# Altium PCB PCB1.PcbDoc
Units mm, origin at the board's own origin, x right, y up, seen from the top; angles counter-clockwise.
Board outline 161 x 122 mm, 2 copper layers (Top Layer, Bottom Layer); 10 components, 50 nets, 180 pads, 44 vias.
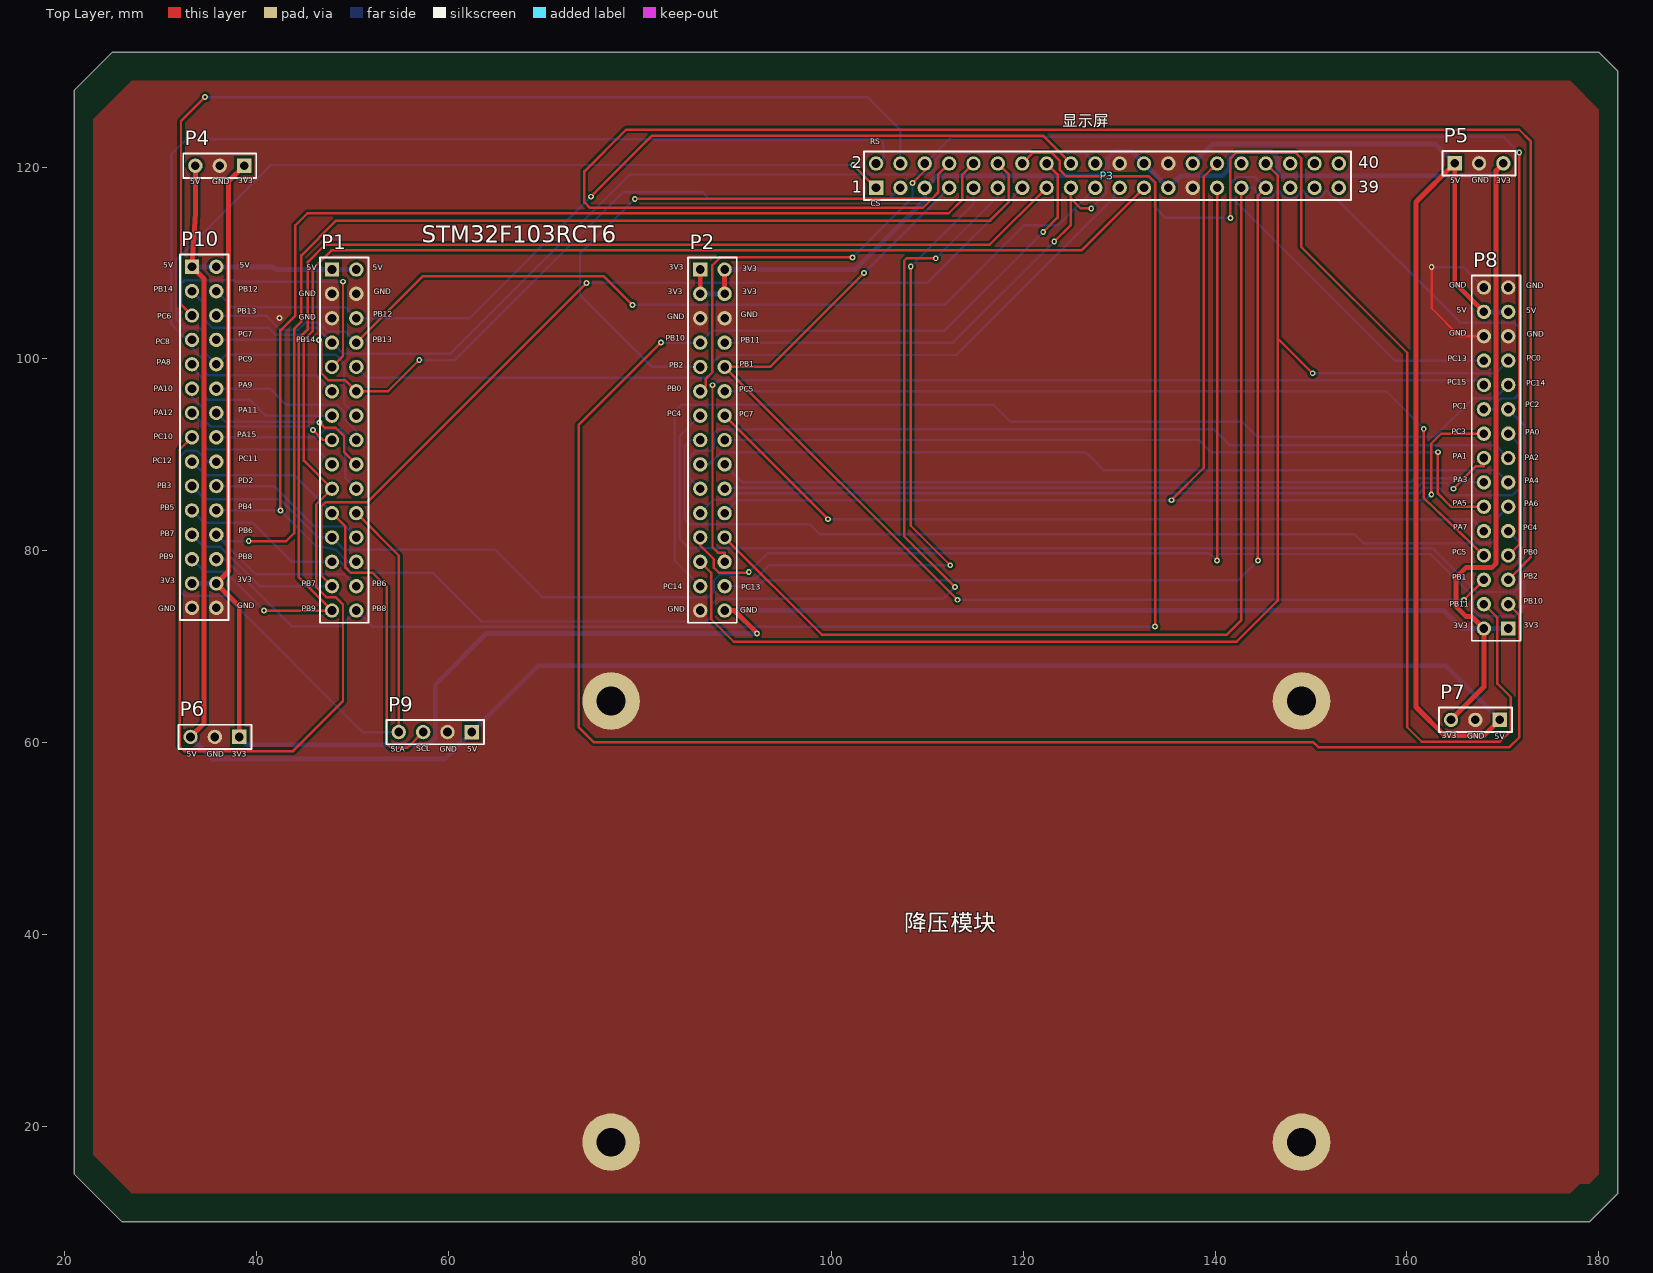
[diagram p0: Top Layer view]
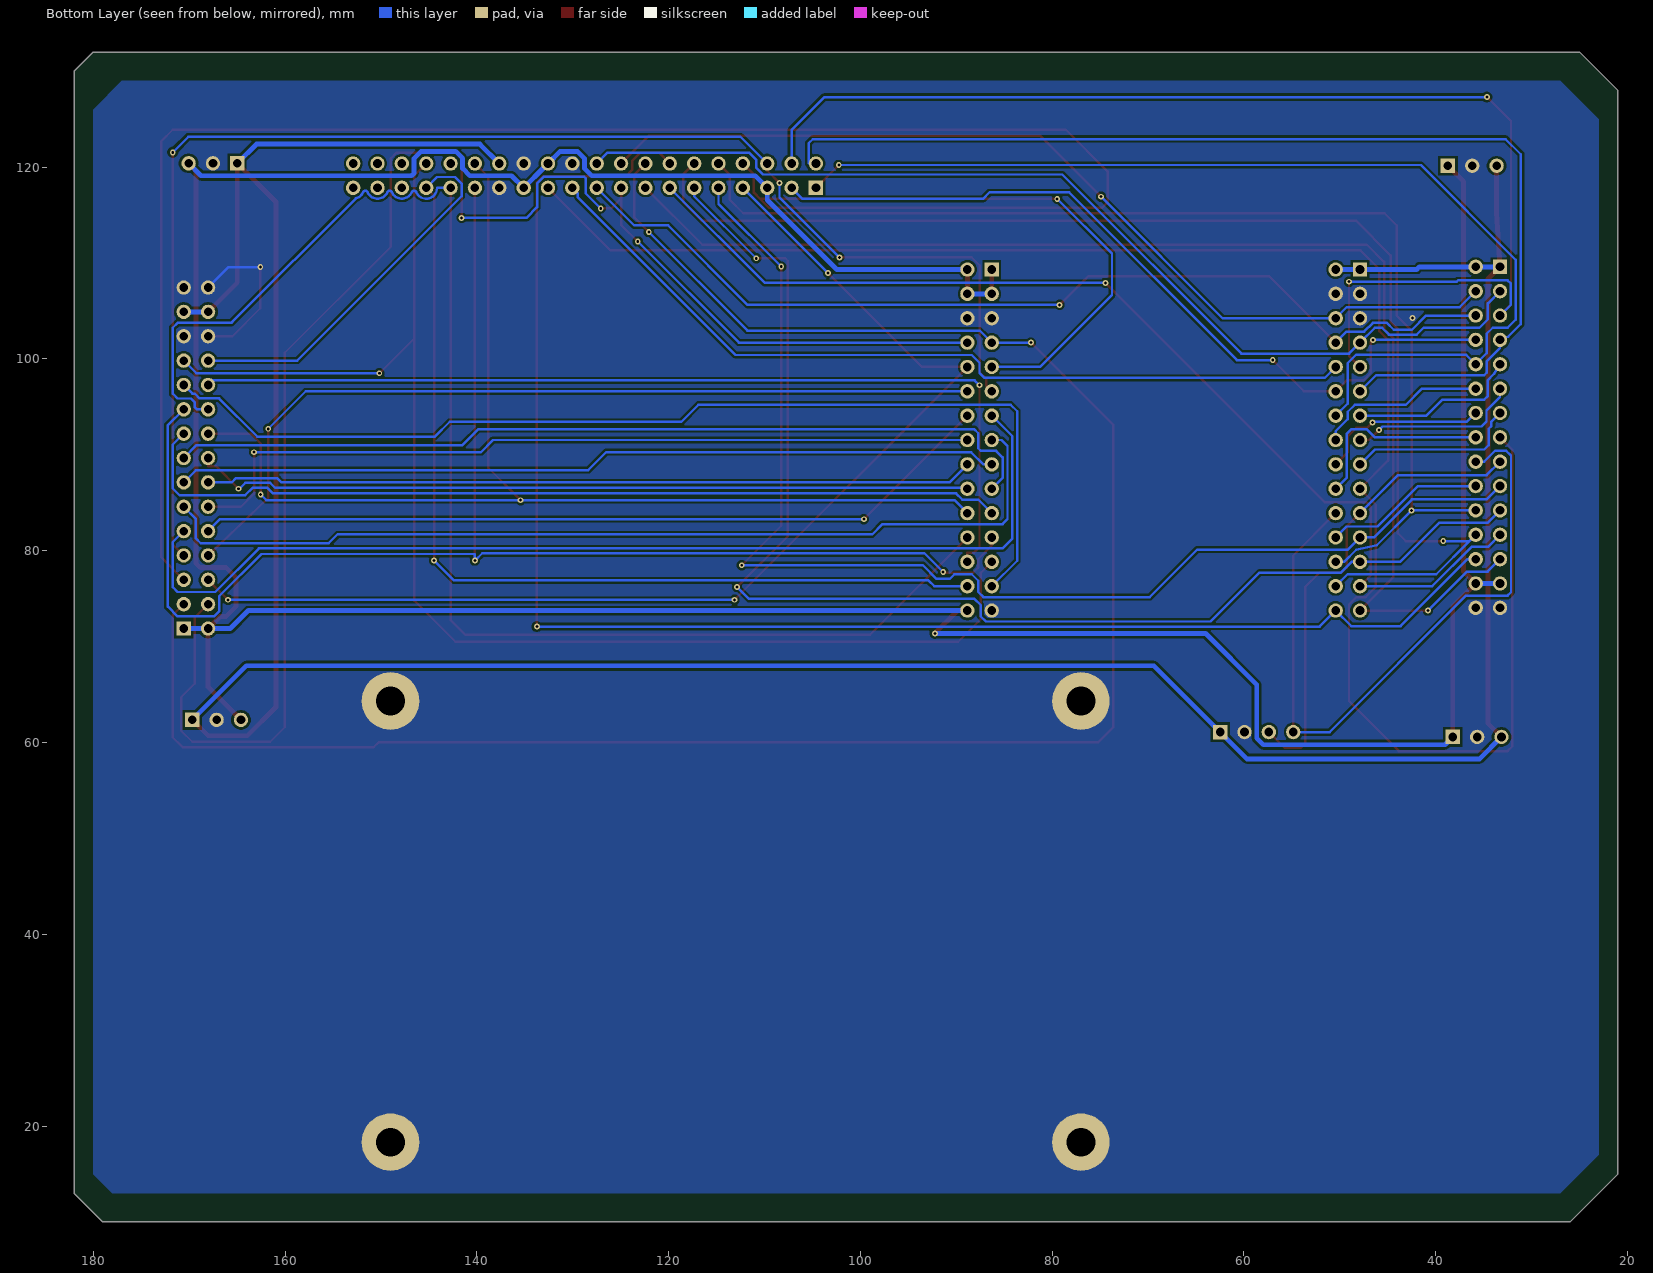
[diagram p1: Bottom Layer view, seen from below]

## Layer stack, top to bottom
Top Solder: solder mask 0.0102, Solder Resist, Dk 3.5
Top Layer: signal copper 0.0356
Dielectric 1: dielectric 0.32, FR-4, Dk 4.8
Bottom Layer: signal copper 0.0356
Bottom Solder: solder mask 0.0102, Solder Resist, Dk 3.5

## Board outline
21,15 21,128 25,132 180,132 182,130 182,13 179,10 26,10

## Design rules (kind name [scope] priority, off if disabled: settings)
Clearance [All] p1: gap=0.254 ignorepadtopadclearanceinfootprint=FALSE
PlaneConnect [All] p1: planeconnectstyle=Direct reliefexpansion=0.508 reliefentries=4 reliefconductorwidth=0.254 reliefairgap=0.254
PolygonConnect [All] p1: connectstyle=Direct reliefconductorwidth=0.254 reliefentries=4 polygonreliefangle="90 Angle" airgapwidth=0.254
RoutingVias [All] p1: holewidth=0.305 width=0.61 viastyle="Through Hole" minholewidth=0.305 minwidth=0.61 maxholewidth=0.305 maxwidth=0.61
SolderMaskExpansion [All] p1: expansion=0.102 istentingtop=FALSE
Width Width_2 [InNet('5v')] p1: maxlimit=0.508 minlimit=0.508 preferedwidth=0.508 minimp=50.000000 maximp=50.000000 favimp=50.000000
Width Width_1 [InNet('3V3')] p2: maxlimit=0.508 minlimit=0.508 preferedwidth=0.508 minimp=50.000000 maximp=50.000000 favimp=50.000000
Width [All] p3: maxlimit=0.254 minlimit=0.254 preferedwidth=0.254
29 further rules are at their usual default settings.

## Components (designator, comment, footprint, x,y, rotation, side; value= is the part's Value field where it differs from the comment)
P1 "LEFT" IDE15X2_2.54 47.899,109.32 r270 top locked
P2 "RIGHT" IDE15X2_2.54 86.3,109.32 r270 top locked
P3 "显示屏" HDR2X20 104.635,117.835 r0 top
P4 "Header 3" HDR1X3 38.735,120.142 r180 top
P5 "Header 3" HDR1X3 164.973,120.396 r0 top
P6 "Header 3" HDR1X3 38.227,60.579 r180 top
P7 "Header 3" HDR1X3 169.672,62.357 r180 top
P8 "" IDE15X2_2.54 170.561,71.882 r90 top
P9 "Header 4" HDR1X4 62.484,61.087 r180 top
P10 "" IDE15X2_2.54 33.3,109.6 r270 top

## Footprints (in the part's own frame and the unit in brackets; to place one, negate y for a bottom-side part, rotate by r counter-clockwise, add the part's x,y. Pads: shape width x height; smd on the part's side, far side on the other; paste and mask are expansions set on the pad)
HDR1X3 [mm] "Connector; Header; 3 Position"
  rect 1.5x1.5 hole 0.9: 1(0,0)
  round 1.5 hole 0.9: 2(2.54,0) 3(5.08,0)
  silkscreen extent -1.27,-1.27 6.35,1.27
HDR1X4 [mm] "Connector; Header; 4 Position"
  rect 1.5x1.5 hole 0.9: 1(0,0)
  round 1.5 hole 0.9: 2(2.54,0) 3(5.08,0) 4(7.62,0)
  silkscreen extent -1.27,-1.27 8.89,1.27
HDR2X20 [mm] "Connector; Header; 20x2 Position"
  rect 1.5x1.5 hole 0.9: 1(0,0)
  round 1.5 hole 0.9: 2(0,2.54) 3(2.54,0) 4(2.54,2.54) 5(5.08,0) 6(5.08,2.54) 7(7.62,0) 8(7.62,2.54) 9(10.16,0) 10(10.16,2.54) 11(12.7,0) 12(12.7,2.54) 13(15.24,0) 14(15.24,2.54) 15(17.78,0) 16(17.78,2.54) 17(20.32,0) 18(20.32,2.54) 19(22.86,0) 20(22.86,2.54) 21(25.4,0) 22(25.4,2.54) 23(27.94,0) 24(27.94,2.54) 25(30.48,0) 26(30.48,2.54) 27(33.02,0) 28(33.02,2.54) 29(35.56,0) 30(35.56,2.54) 31(38.1,0) 32(38.1,2.54) 33(40.64,0) 34(40.64,2.54) 35(43.18,0) 36(43.18,2.54) 37(45.72,0) 38(45.72,2.54) 39(48.26,0) 40(48.26,2.54)
  silkscreen extent -1.27,-1.27 49.53,3.81
IDE15X2_2.54 [mm]
  rect 1.5x1.5 hole 0.9: 1(0,0)
  round 1.5 hole 0.9: 2(0,2.54) 3(2.54,0) 4(2.54,2.54) 5(5.08,0) 6(5.08,2.54) 7(7.62,0) 8(7.62,2.54) 9(10.16,0) 10(10.16,2.54) 11(12.7,0) 12(12.7,2.54) 13(15.24,0) 14(15.24,2.54) 15(17.78,0) 16(17.78,2.54) 17(20.32,0) 18(20.32,2.54) 19(22.86,0) 20(22.86,2.54) 21(25.4,0) 22(25.4,2.54) 23(27.94,0) 24(27.94,2.54) 25(30.48,0) 26(30.48,2.54) 27(33.02,0) 28(33.02,2.54) 29(35.56,0) 30(35.56,2.54)
  silkscreen extent -1.27,-1.27 36.83,3.81

## Part data
P1 P2 P8 P10: library part "Header 15X2", "Header, 15-Pin, Dual row", LatestRevisionDate=17-Jul-2002, LatestRevisionNote="Re-released for DXP Platform.", Publisher="Altium Limited"
P3: library part "Header 20X2", "Header, 20-Pin, Dual row", LatestRevisionDate=17-Jul-2002, LatestRevisionNote="Re-released for DXP Platform.", Publisher="Altium Limited"
P4 P5 P6 P7: "Header, 3-Pin", LatestRevisionDate=17-Jul-2002, LatestRevisionNote="Re-released for DXP Platform.", Publisher="Altium Limited"
P9: "Header, 4-Pin", LatestRevisionDate=17-Jul-2002, LatestRevisionNote="Re-released for DXP Platform.", Publisher="Altium Limited"

## Free pads (board coordinates)
  round 6 hole 3: 1(77,18.325) 1(77,64.325) 1(149,18.325) 1(149,64.325)

## Via types
v1: diameter 0.61, hole 0.305, Top Layer to Bottom Layer, 44 vias

## Nets (pads, with @x,y where several pads share a name; then routed paths per layer and width w, separated by ;. In a path a pad name is that pad's centre, name@x,y a point inside that pad or via, vN(x,y) a via of type N, cw(c..) or ccw(c..) an arc to the next point about the centre after c; other vN are vias at no path point)
3V3: P2.1 P2.2 P2.3 P2.4 P2.30 P3.5 P3.24 P3.25 P4.1 P5.3 P6.1 P7.3 P8.1 P8.2 P10.27 P10.28 | length 380.3
  Top Layer w0.508: P6.1 38.227,74.193 P10.28 37.109,77.849 37.109,118.516 P4.1 ; P2.3 P2.1 ; P2.30 89.841,73.76 v1(92.227,71.374) ; P2.4 P2.2 ; P7.3 168.021,65.786 P8.2 166.776,73.127 166.167,73.127 165.125,74.168 165.125,77.216 166.141,78.232 168.827,78.232 169.291,78.696 169.291,119.634 P5.3
  Bottom Layer w0.508: P10.27 P10.28 ; P6.1 39.04,59.766 57.988,59.766 58.674,60.452 58.674,66.04 64.008,71.374 v1(92.227,71.374) ; P2.3 P2.4 ; P2.30 90.651,73.76 90.653,73.762 163.828,73.762 165.708,71.882 P8.2 P8.1 ; P2.2 102.463,109.32 109.715,116.572 P3.5 110.981,119.101 128.016,119.101 128.777,119.862 128.777,120.904 129.506,121.633 131.317,121.633 P3.24 ; P5.3 168.758,119.101 146.812,119.101 146.533,119.38 146.533,120.904 145.804,121.633 142.206,121.633 141.477,120.904 141.477,119.862 140.716,119.101 136.381,119.101 P3.25 P3.24@132.943,120.007 ; P3.24 P3.24@132.943,120.007 ; P3.24 132.575,120.363 132.93,120.007 P3.24@132.943,120.007
5V: P1.1 P1.2 P3.28 P4.3 P5.1 P6.3 P7.1 P8.27 P8.28 P9.1 P10.1 P10.2 | length 339.1
  Top Layer w0.508: P6.3 34.569,62.001 34.569,108.331 P10.1 33.655,115.239 P4.3 ; P8.28 164.973,107.95 P5.1 160.934,116.357 160.934,63.703 163.932,60.706 168.021,60.706 P7.1
  Bottom Layer w0.508: P6.3 35.433,58.293 59.69,58.293 P9.1 69.393,67.996 164.033,67.996 P7.1 ; P10.1 P10.2 41.707,109.6 41.987,109.32 P1.1 P1.2 ; P3.28 139.675,122.395 162.974,122.395 P5.1 ; P8.28 P8.27
GND: P1.3 P1.4 P1.5 P2.5 P2.6 P2.29 P3.22 P3.26 P3.27 P4.2 P5.2 P6.2 P7.2 P8.25 P8.26 P8.29 P8.30 P9.2 P10.29 P10.30 pad.1 | length 17.3
  Top Layer w0.254: v1(162.575,109.575) 162.575,105.275 165.488,102.362 P8.26
  Bottom Layer w0.254: v1(162.575,109.575) 165.888,109.575 P8.30
  other v1: 42.418,104.267
PA0: P2.21 P8.17 | length 93.3
  Bottom Layer w0.254: P2.21 87.699,85.319 89.357,85.319 90.018,85.979 161.266,85.979 161.843,86.556 163.376,86.556 164.156,85.776 170.993,85.776 171.704,86.487 171.704,91.059 P8.17
PA1: P2.20 P8.16 | length 81.5
  Top Layer w0.254: v1(164.846,86.462) 167.208,88.824 168.021,88.824 P8.16
  Bottom Layer w0.254: P2.20 88.943,86.563 161.036,86.563 161.537,87.064 164.142,87.064 164.744,86.462 v1(164.846,86.462)
PA2: P2.19 P8.15 | length 92.5
  Bottom Layer w0.254: P2.19 85.166,87.594 85.166,89.723 85.852,90.409 87.427,90.409 87.706,90.688 87.706,92.253 88.138,92.685 139.827,92.685 141.503,91.008 169.215,91.008 P8.15
PA3: P2.18 P8.14 | length 80.3
  Bottom Layer w0.254: P2.18 90.718,87.122 160.377,87.122 160.827,87.572 165.105,87.572 165.555,87.122 P8.14
PA4: P2.17 P8.13 | length 86.1
  Bottom Layer w0.254: P2.17 87.177,89 88.449,90.272 126.517,90.272 128.397,88.392 169.291,88.392 P8.13
PA5: P2.16 P8.12 | length 84.6
  Top Layer w0.254: v1(163.22,90.272) 163.22,85.954 164.592,84.582 P8.12
  Bottom Layer w0.254: P2.16 138.305,91.54 139.573,90.272 v1(163.22,90.272)
PA6: P2.15 P8.11 | length 99.3
  Bottom Layer w0.254: P2.15 85.266,91.54 84.658,90.932 84.658,83.287 85.166,82.779 97.688,82.779 98.755,81.712 154.508,81.712 155.448,80.772 168.783,80.772 169.291,81.28 169.291,83.312 P8.11
PA7: P2.14 P8.10 | length 84.2
  Top Layer w0.254: P2.14 v1(99.633,83.287)
  Bottom Layer w0.254: v1(99.633,83.287) 166.776,83.287 P8.10
PA8: P1.13 P10.9 | length 17.9
  Bottom Layer w0.254: P10.9 33.948,98.423 34.569,97.801 34.569,96.128 34.939,95.758 39.294,95.758 40.972,94.08 P1.13
PA9: P1.16 P10.12 | length 17.8
  Bottom Layer w0.254: P10.12 41.427,96.9 43.103,95.225 48.438,95.225 49.174,94.488 49.174,93.726 50.439,92.461 P1.16
PA10: P1.15 P10.11 | length 18
  Top Layer w0.254: v1(45.923,92.583) 46.966,91.54 P1.15
  Bottom Layer w0.254: P10.11 33.3,96.012 34.709,94.603 34.709,93.472 35.23,92.951 45.555,92.951 v1(45.923,92.583)
PA11: P1.18 P10.14 | length 17.8
  Top Layer w0.254: v1(46.609,93.37) 47.168,92.812 48.285,92.812 49.149,91.948 49.149,90.29 P1.18
  Bottom Layer w0.254: P10.14 36.741,93.459 46.52,93.459 v1(46.609,93.37)
PA12: P1.17 P10.13 | length 18.1
  Bottom Layer w0.254: P10.13 34.201,93.459 34.201,92.996 34.476,92.721 34.476,91.014 34.939,90.551 46.348,90.551 P1.17
PA15: P1.20 P10.16 | length 20.2
  Bottom Layer w0.254: P10.16 46.354,91.82 47.219,92.685 48.768,92.685 49.301,92.151 49.301,87.598 P1.20
PB0: P2.11 P3.6 P8.7 | length 147.9
  Top Layer w0.254: P2.11 86.893,97.213 86.893,97.942 87.554,98.603 87.554,109.753 88.392,110.592 v1(102.184,110.592) ; v1(108.433,118.339) 109.715,119.621 P3.6 ; P8.7 171.704,80.645 v1(171.704,121.539)
  Bottom Layer w0.254: v1(102.184,110.592) 108.433,116.84 v1(108.433,118.339) ; P3.6 112.505,123.165 170.078,123.165 v1(171.704,121.539)
PB1: P2.10 P3.7 P8.6 | length 121.3
  Top Layer w0.254: v1(103.386,108.966) 93.58,99.16 P2.10 v1(113.121,74.879) ; v1(165.938,74.879) P8.6
  Bottom Layer w0.254: v1(103.386,108.966) P3.7 ; v1(113.121,74.879) v1(165.938,74.879)
PB2: P2.9 P3.8 P8.5 | length 251.2
  Top Layer w0.254: v1(79.477,116.688) 110.439,116.688 ; P3.8 111.1,119.22 111.1,117.348 110.439,116.688 ; P8.5 172.898,79.299 172.898,122.707 171.704,123.901 78.562,123.901 74.219,119.558 74.219,116.332 74.803,115.748 109.499,115.748 110.439,116.688
  Bottom Layer w0.254: v1(79.477,116.688) 73.762,110.973 73.762,106.655 81.256,99.16 P2.9
PB3: P1.23 P3.9 P10.19 | length 130.1
  Top Layer w0.254: v1(108.255,109.626) 108.255,82.601 v1(112.37,78.486)
  Bottom Layer w0.254: P10.19 34.696,85.344 42.494,85.344 46.458,81.38 P1.23 49.167,80.112 64.872,80.112 69.825,75.159 87.173,75.159 87.706,75.692 87.706,76.86 88.392,77.546 90.201,77.546 90.679,77.068 92.051,77.068 93.469,78.486 v1(112.37,78.486) ; v1(108.255,109.626) 114.795,116.167 P3.9
PB4: P1.26 P3.10 P10.22 | length 122
  Top Layer w0.254: v1(42.52,84.2) 42.52,102.976 44.082,104.539 44.082,113.932 45.339,115.189 112.217,115.189 113.64,116.611 113.64,119.22 P3.10
  Bottom Layer w0.254: P10.22 v1(42.52,84.2) 46.151,80.569 48.297,80.105 49.562,78.84 P1.26
PB5: P1.25 P3.11 P10.21 | length 136.2
  Top Layer w0.254: v1(110.858,110.49) 107.823,110.49 107.569,110.236 107.569,81.483 v1(112.852,76.2)
  Bottom Layer w0.254: P10.21 34.569,82.931 39.624,82.931 43.715,78.84 P1.25 48.77,78.84 49.901,77.709 58.384,77.709 63.475,72.619 86.919,72.619 87.452,73.152 87.452,74.32 88.113,74.981 111.633,74.981 v1(112.852,76.2) ; v1(110.858,110.49) 117.335,116.967 P3.11
PB6: P1.28 P3.12 P10.24 | length 134.5
  Top Layer w0.254: v1(39.218,81.001) 43.129,81.001 43.942,81.813 43.942,103.129 44.701,103.888 44.701,110.799 48.329,114.427 116.535,114.427 118.491,116.383 118.491,119.219 P3.12
  Bottom Layer w0.254: P10.24 36.499,81.001 ; v1(39.218,81.001) 36.499,81.001 ; P1.28 49.193,77.546 39.954,77.546 36.499,81.001
PB7: P1.27 P3.13 P10.23 | length 112.5
  Top Layer w0.254: P1.27 46.761,77.438 46.761,84.582 47.244,85.065 51.587,85.065 v1(74.447,107.925)
  Bottom Layer w0.254: P10.23 34.569,80.391 36.271,80.391 40.362,76.3 P1.27 ; v1(74.447,107.925) 109.965,107.925 P3.13
PB8: P1.30 P3.14 P10.26 | length 164.6
  Top Layer w0.254: P3.14 121.006,121.506 122.944,121.506 123.8,120.65 123.8,119.71 124.46,119.05 133.096,119.05 133.731,118.415 v1(133.731,72.085)
  Bottom Layer w0.254: P10.26 36.68,79.12 43.664,72.136 48.815,72.136 P1.30 52.114,72.085 v1(133.731,72.085)
PB9: P1.29 P3.15 P10.25 | length 135.2
  Top Layer w0.254: v1(40.819,73.76) P1.29 44.45,77.209 44.45,102.188 45.39,103.128 45.39,110.109 47.193,111.912 116.492,111.912 P3.15
  Bottom Layer w0.254: P10.25 34.594,77.826 36.754,77.826 v1(40.819,73.76)
PB10: P2.7 P3.16 P8.3 | length 210.3
  Top Layer w0.254: v1(82.218,101.7) 73.609,93.091 73.609,61.62 75.184,60.046 150.216,60.046 150.749,59.512 170.688,59.512 171.704,60.528 171.704,73.279 P8.3 ; v1(122.064,113.233) 123.571,114.74 123.571,119.219 P3.16
  Bottom Layer w0.254: v1(82.218,101.7) P2.7 87.546,102.946 111.777,102.946 v1(122.064,113.233)
PB11: P2.8 P3.17 P8.4 | length 171.9
  Top Layer w0.254: v1(123.215,112.243) 124.955,113.982 124.955,116.726 ; P3.17 124.955,116.726 ; v1(127.076,115.697) 125.984,115.697 124.955,116.726 ; v1(141.58,114.706) 141.58,120.904 142.189,121.514 148.361,121.514 148.971,120.904 148.971,111.684 160.02,100.635 160.02,61.595 161.544,60.071 169.672,60.071 170.815,61.214 170.815,64.745 169.418,66.142 169.418,73.025 P8.4
  Bottom Layer w0.254: P2.8 112.673,101.7 v1(123.215,112.243) ; v1(127.076,115.697) 128.651,117.272 128.651,118.838 128.825,119.012 132.998,119.012 133.706,118.303 133.706,115.824 134.824,114.706 v1(141.58,114.706)
PB12: P1.6 P3.18 P10.4 | length 99.4
  Top Layer w0.254: v1(74.905,116.916) 81.28,123.292 122.038,123.292 P3.18
  Bottom Layer w0.254: P10.4 37.515,105.385 49.294,105.385 P1.6 62.228,104.24 v1(74.905,116.916)
PB13: P1.8 P3.19 P10.6 | length 102.6
  Top Layer w0.254: P1.8 57.349,108.61 76.251,108.61 v1(79.223,105.639)
  Bottom Layer w0.254: P10.6 41.022,104.52 42.496,103.046 44.375,103.046 45.088,103.759 46.559,103.759 47.473,102.845 49.294,102.845 P1.8 ; v1(79.223,105.639) 111.76,105.639 120.04,113.919 123.579,113.919 P3.19
PB14: P1.7 P3.20 P10.3 | length 108.1
  Bottom Layer w0.254: P10.3 34.569,105.791 34.569,104.14 35.458,103.251 41.275,103.251 41.988,102.538 44.883,102.538 45.596,103.251 46.348,103.251 P1.7 49.04,100.559 60.274,100.559 78.943,119.228 110.167,119.228 110.846,119.907 110.846,120.727 111.633,121.514 126.356,121.514 P3.20
PB15: P1.10 P3.21 | length 89.2
  Bottom Layer w0.254: P1.10 51.58,98.019 87.071,98.019 87.579,98.527 87.579,99.593 88.392,100.406 113.03,100.406 129.464,116.84 129.464,117.264 P3.21
PC0: P2.25 P3.34 P8.23 | length 140.5
  Top Layer w0.254: P2.25 87.452,77.688 87.452,72.847 89.789,70.51 142.24,70.51 146.524,74.794 146.524,102.142 ; P3.34 146.524,119.126 146.524,102.142 ; v1(150.165,98.501) 146.524,102.142
  Bottom Layer w0.254: v1(150.165,98.501) 169.24,98.501 P8.23
PC1: P2.24 P3.31 P8.20 | length 152.5
  Top Layer w0.254: P2.24 98.973,71.247 141.224,71.247 142.735,72.758 P3.31
  Bottom Layer w0.254: P3.31 144.144,117.835 ccw(c145.275,117.835) 146.312,117.385 cw(c146.545,117.282) 146.778,117.385 ccw(c147.815,117.835) 148.852,117.385 cw(c149.085,117.282) 149.318,117.385 ccw(c150.355,117.835) 151.392,117.385 cw(c151.625,117.282) 151.858,117.385 ccw(c152.895,117.835) 152.609,116.741 165.516,103.834 165.591,103.759 171.196,103.759 171.704,103.251 171.704,96.381 171.196,95.873 169.799,95.873 169.43,95.504 169.43,94.996 169.176,94.742 P8.20
PC2: P2.23 P3.29 P8.19 | length 154.5
  Top Layer w0.254: P2.23 86.3,80.543 87.709,79.134 87.709,78.232 88.242,77.699 91.288,77.699 v1(91.364,77.775) ; v1(140.195,78.969) P3.29
  Bottom Layer w0.254: v1(91.364,77.775) 93.32,79.731 139.433,79.731 v1(140.195,78.969) 140.195,79.654 162.467,79.654 166.878,75.244 166.878,73.66 167.386,73.152 171.196,73.152 172.212,74.168 172.212,93.091 P8.19
PC3: P2.22 P3.30 P8.18 | length 122.8
  Top Layer w0.254: v1(135.433,85.268) 138.811,88.646 138.811,118.991 P3.30 ; v1(162.535,85.852) 162.535,91.161 163.576,92.202 P8.18
  Bottom Layer w0.254: P2.22 90.188,85.268 v1(135.433,85.268) 161.95,85.268 v1(162.535,85.852)
PC4: P2.13 P8.9 | length 110.1
  Bottom Layer w0.254: P2.13 84.15,91.93 84.15,81.28 85.192,80.239 162.724,80.239 167.27,75.692 171.196,75.692 171.704,76.2 171.704,80.899 P8.9
PC5: P2.12 P8.8 | length 90.4
  Top Layer w0.254: v1(161.747,92.71) 161.747,85.493 P8.8
  Bottom Layer w0.254: P2.12 157.837,96.62 v1(161.747,92.71)
PC6: P1.9 P3.4 P10.5 | length 132
  Top Layer w0.254: P10.5 32.156,105.664 32.156,124.79 v1(34.671,127.305) ; P1.9 49.047,100.308 v1(49.047,108.052)
  Bottom Layer w0.254: P10.5 32.169,105.651 32.169,107.848 32.512,108.191 37.668,108.191 37.808,108.052 v1(49.047,108.052) ; v1(34.671,127.305) 103.752,127.305 107.175,123.881 P3.4
PC7: P1.12 P3.3 P10.8 | length 84.8
  Top Layer w0.254: v1(46.559,101.98) 46.761,101.778 46.761,98.552 47.549,97.765 49.294,97.765 P1.12 53.745,96.62 v1(56.998,99.873)
  Bottom Layer w0.254: P10.8 v1(46.559,101.98) ; v1(56.998,99.873) 60.731,99.873 78.232,117.373 86.538,117.373 87.224,116.688 106.028,116.688 P3.3
PC8: P1.11 P3.2 P10.7 | length 116.4
  Bottom Layer w0.254: P1.11 46.221,98.298 34.95,98.298 34.696,98.552 34.696,99.746 33.3,101.142 P10.7 32.461,102.311 31.14,103.632 31.14,121.336 32.715,122.911 104.972,122.911 105.385,122.498 105.385,120.375 P3.2
PC9: P1.14 P3.1 P10.10 | length 111.7
  Top Layer w0.254: v1(102.252,120.218) P3.1
  Bottom Layer w0.254: P1.14 49.174,95.345 49.174,99.568 48.311,100.432 36.832,100.432 P10.10 34.696,100.584 34.696,102.616 34.061,103.251 32.512,103.251 31.661,104.102 31.661,110.325 41.554,120.218 v1(102.252,120.218)
PC10: P1.19 P3.23 P10.15 | length 191.4
  Top Layer w0.254: P10.15 32.004,90.524 32.004,59.614 32.512,59.106 43.84,59.106 49.047,64.313 49.047,74.371 48.26,75.159 47.295,75.159 46.253,76.2 46.253,84.814 P1.19 44.971,89.388 44.971,101.976 45.898,102.903 45.898,109.372 47.84,111.315 126.055,111.315 P3.23
PC11: P1.22 P9.4 P10.18 | length 72
  Top Layer w0.254: P1.22 54.864,79.495 P9.4
  Bottom Layer w0.254: P10.18 34.951,89.28 33.807,90.424 32.664,90.424 32.156,89.916 32.156,75.667 32.512,75.311 36.83,75.311 51.054,61.087 P9.4
PC12: P1.21 P9.3 P10.17 | length 49.2
  Top Layer w0.254: P1.21 49.301,82.518 49.301,78.232 49.835,77.699 52.121,77.699 53.619,76.2 53.619,59.893 54.077,59.436 55.753,59.436 P9.3
  Bottom Layer w0.254: P10.17 34.696,87.884 43.935,87.884 P1.21
PC13: P2.28 P3.33 P8.24 | length 135.2
  Top Layer w0.254: v1(144.45,78.969) 144.45,117.01 P3.33
  Bottom Layer w0.254: P2.28 92.299,76.3 92.91,76.91 142.391,76.91 v1(144.45,78.969) ; P3.33 144.144,118.966 142.267,118.966 141.58,118.279 141.58,116.967 158.725,99.822 P8.24
PC14: P2.27 P8.21 | length 110.2
  Bottom Layer w0.254: P2.27 83.642,78.958 83.642,94.539 84.328,95.225 116.891,95.225 118.669,93.447 142.824,93.447 144.374,91.897 162.89,91.897 166.878,95.885 168.922,95.885 169.418,96.381 169.66,96.381 P8.21
PC15: P2.26 P8.22 | length 100.2
  Top Layer w0.254: v1(87.579,97.257) 87.579,80.366 88.138,79.807 88.84,79.807 P2.26
  Bottom Layer w0.254: v1(87.579,97.257) 88.087,97.765 167.538,97.765 P8.22
PD2: P1.24 P10.20 | length 16.8
  Bottom Layer w0.254: P10.20 41.86,86.74 46.076,82.525 49.294,82.525 P1.24
pads on no net: P3.32 P3.35 P3.36 P3.37 P3.38 P3.39 P3.40

## Polygon pours and split planes (outlines as drawn)
GND on Top Layer "GND_L01_P002" (solid, pour order 2): 26,130 27,129 177,129 180,126 180,15 179,14 178,14 177,13 27,13 23,17 23,125 27,129
GND on Bottom Layer "GND_L02_P004" (solid, pour order 4): 180,126 180,15 178,13 27,13 23,17 23,125 27,129 177,129

## Silkscreen, mask and mechanical layers (free items; w line width, h text height)
Top Overlay:
  text "显示屏" at 124.05,123.85 h2
  text "RS" at 104.05,122.175 h1
  text "GND" at 166.75,118.15 h1
  text "3V3" at 38.1,118.1 h1
  text "5V" at 164.525,118.1 h1
  text "3V3" at 169.325,118.1 h1
  text "5V" at 33.1,118 h1
  text "GND" at 35.4,118 h1
  text "CS" at 104.1,115.7 h1
  text "STM32F103RCT6" at 57.25,111.55 h3
  text "5V" at 30.3,109.3 h1
  text "5V" at 38.3,109.3 h1
  text "3V3" at 83,109.075 h1
  text "5V" at 52.175,109.05 h1
  text "5V" at 45.25,109.025 h1
  text "3V3" at 90.7,108.95 h1
  text "GND" at 164.425,107.2 h1
  text "GND" at 172.45,107.15 h1
  text "PB14" at 29.3,106.8 h1
  text "PB12" at 38.2,106.8 h1
  text "GND" at 52.25,106.55 h1
  text "3V3" at 82.925,106.525 h1
  text "3V3" at 90.675,106.525 h1
  text "GND" at 44.45,106.3 h1
  text "5V" at 165.175,104.625 h1
  text "5V" at 172.45,104.55 h1
  text "PB13" at 38,104.5 h1
  text "PB12" at 52.2,104.175 h1
  text "GND" at 90.525,104.125 h1
  text "PC6" at 29.7,104 h1
  text "GND" at 82.875,103.925 h1
  text "GND" at 44.425,103.9 h1
  text "GND" at 164.425,102.2 h1
  text "GND" at 172.5,102.125 h1
  text "PC7" at 38.1,102.1 h1
  text "PB10" at 82.725,101.675 h1
  text "PB14" at 44.15,101.55 h1
  text "PB13" at 52.125,101.525 h1
  text "PB11" at 90.5,101.45 h1
  text "PC8" at 29.5,101.3 h1
  text "PC0" at 172.5,99.6 h1
  text "PC13" at 164.25,99.55 h1
  text "PC9" at 38.1,99.5 h1
  text "PA8" at 29.6,99.2 h1
  text "PB1" at 90.4,98.95 h1
  text "PB2" at 83.05,98.875 h1
  text "PC15" at 164.2,97.1 h1
  text "PC14" at 172.425,97 h1
  text "PA9" at 38.1,96.8 h1
  text "PB0" at 82.875,96.425 h1
  text "PA10" at 29.3,96.4 h1
  text "PC5" at 90.375,96.35 h1
  text "PC2" at 172.325,94.75 h1
  text "PC1" at 164.75,94.6 h1
  text "PA11" at 38.1,94.2 h1
  text "PA12" at 29.3,93.9 h1
  text "PC4" at 82.875,93.825 h1
  text "PC7" at 90.375,93.75 h1
  text "PC3" at 164.65,91.925 h1
  text "PA0" at 172.325,91.9 h1
  text "PA15" at 38,91.6 h1
  text "PC10" at 29.3,91.4 h1
  text "PA1" at 164.775,89.4 h1
  text "PA2" at 172.3,89.2 h1
  text "PC11" at 38.2,89.1 h1
  text "PC12" at 29.2,88.9 h1
  text "PA3" at 164.8,86.925 h1
  text "PA4" at 172.275,86.85 h1
  text "PD2" at 38.1,86.8 h1
  text "PB3" at 29.7,86.3 h1
  text "PA5" at 164.75,84.475 h1
  text "PA6" at 172.225,84.4 h1
  text "PB4" at 38.1,84.1 h1
  text "PB5" at 30,84 h1
  text "PA7" at 164.8,81.95 h1
  text "PC4" at 172.125,81.925 h1
  text "PB6" at 38.2,81.6 h1
  text "PB7" at 30,81.3 h1
  text "PB0" at 172.175,79.375 h1
  text "PC5" at 164.725,79.35 h1
  text "PB9" at 29.9,78.9 h1
  text "PB8" at 38.1,78.9 h1
  text "PB2" at 172.175,76.875 h1
  text "PB1" at 164.725,76.775 h1
  text "3V3" at 38,76.5 h1
  text "3V3" at 30,76.4 h1
  text "PB6" at 52.1,76.1 h1
  text "PB7" at 44.725,76.075 h1
  text "PC14" at 82.425,75.75 h1
  text "PC13" at 90.6,75.7 h1
  text "PB10" at 172.175,74.275 h1
  text "PB11" at 164.45,73.95 h1
  text "GND" at 38,73.8 h1
  text "GND" at 29.8,73.5 h1
  text "PB9" at 44.725,73.475 h1
  text "PB8" at 52.1,73.475 h1
  text "GND" at 82.925,73.45 h1
  text "GND" at 90.475,73.3 h1
  text "3V3" at 172.2,71.75 h1
  text "3V3" at 164.8,71.725 h1
  text "3V3" at 163.6,60.25 h1
  text "GND" at 166.3,60.175 h1
  text "5V" at 169.175,60.125 h1
  text "SCL" at 56.7,58.875 h1
  text "SLA" at 54.05,58.85 h1
  text "GND" at 59.125,58.8 h1
  text "5V" at 62.025,58.8 h1
  text "GND" at 34.825,58.325 h1
  text "5V" at 32.75,58.3 h1
  text "3V3" at 37.45,58.3 h1
  text "降压模块" at 107.575,39.8 h3

## Text inside footprints (layer, text, board x,y; h text height)
P3: Top Overlay "1" at 102.095,117.327 h1.27; Top Overlay "2" at 102.095,119.867 h1.27; Top Overlay "40" at 154.927,119.867 h1.27; Top Overlay "39" at 154.927,117.327 h1.27